# Altium PCB ESense.PcbDoc (part 3 of 3)
Units mil, origin at the board's own origin, x right, y up, seen from the top; angles counter-clockwise.
Board outline 9200 x 6300 mil, 4 copper layers (Top Layer, GND, POWER, Bottom Layer); 365 components, 215 nets, 1056 pads, 220 vias.
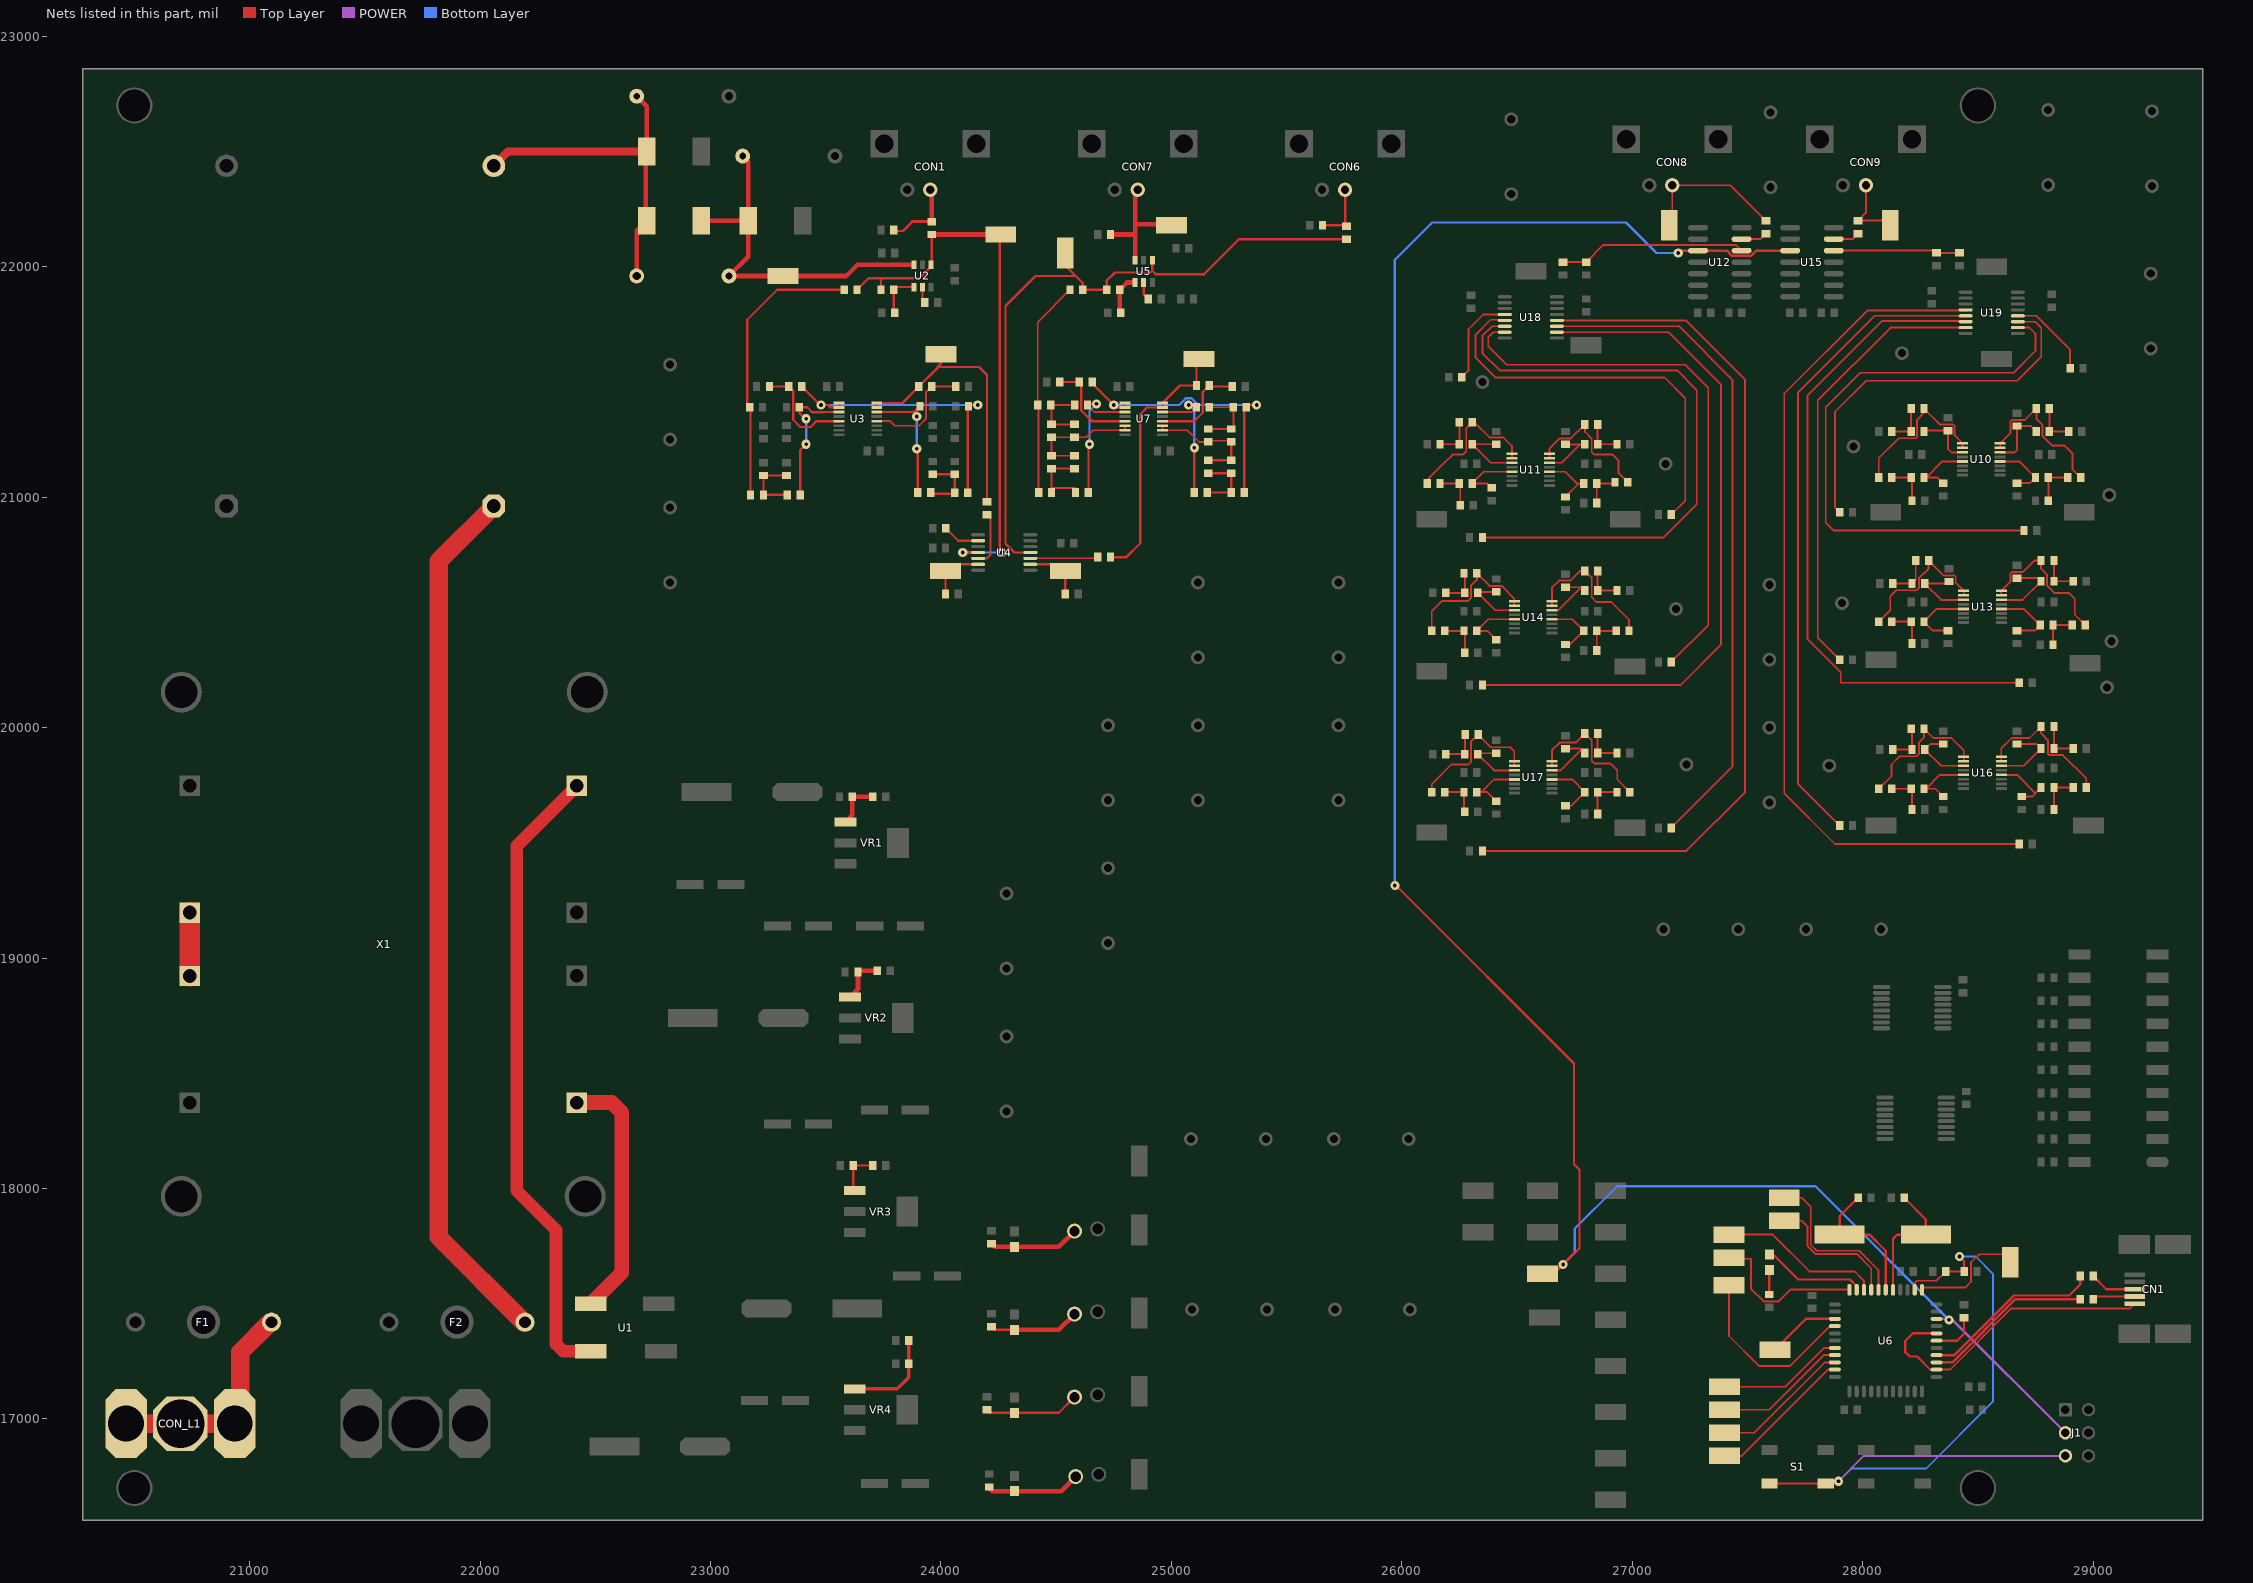
[diagram p5: the nets of this part, all layers, seen from the top]

## Via types
v1: diameter 40/36/36 (per signal layer), hole 16, Top Layer to Bottom Layer, tented both sides, 213 vias
v2: diameter 36, hole 16, Top Layer to Bottom Layer, 2 vias
v3: diameter 40/36/36 (per signal layer), hole 16, Top Layer to Bottom Layer, 1 vias
v4: diameter 35/36/36 (per signal layer), hole 16, Top Layer to Bottom Layer, tented both sides, 1 vias
v5: diameter 40/46/46 (per signal layer), hole 16, Top Layer to Bottom Layer, tented both sides, 1 vias
v6: diameter 60, hole 35, Top Layer to Bottom Layer, tented both sides, 1 vias
v7: diameter 65, hole 35, Top Layer to Bottom Layer, tented both sides, 1 vias

## Nets (pads, with @x,y where several pads share a name; then routed paths per layer and width w, separated by ;. In a path a pad name is that pad's centre, name@x,y a point inside that pad or via, vN(x,y) a via of type N, cw(c..) or ccw(c..) an arc to the next point about the centre after c; other vN are vias at no path point) (continued)
NetC14_1: C14.1 C15.2 R22.2 R23.2 | length 288
  Top Layer w10: R22.2@23330,21094 R23.2@23230,21094 C14.1@23230,21010 C15.2@23334,21010
NetC14_2: C14.2 R16.1 R120.1 | length 1234
  Top Layer w10: R16.1@23170,21390 23160,21400 23160,21770 23290,21900 R120.1@23580,21900 ; C14.2@23174,21010 R16.1@23174,21386
NetC15_1: C15.1 R17.2 U3.3 | length 598.1
  Top Layer w10: C15.1@23390,21010 23390,21205 v1(23415,21230) ; v1@23415,21345 23410,21340 23386,21364 R17.2@23386,21390 23420,21390 23441,21369 23492.84,21369 23493.84,21370 23557.83,21370 U3.3@23558.31,21369.53
  Bottom Layer w10: v1(23415,21230) 23415,21335 23410,21340 v1@23415,21345
  other v1: 23415,21340
NetC20_1: C20.1 R19.2 U3.14 | length 560.9
  Top Layer w10: U3.14@23721.69,21369.53 23883.53,21369.53 R19.2@23895,21381 ; v1(23895,21210) 23900,21205 C20.1@23900,21020 ; v1(23895,21350) R19.2@23895,21381 ; R19.2@23909,21395 R19.2@23895,21381
  Bottom Layer w10: v1(23895,21210) v1(23895,21350)
NetC20_2: C20.2 C21.1 R25.2 R26.2 | length 274
  Top Layer w10: C20.2@23961,21015 C21.1@24060,21015 ; R25.2@23965,21099 R26.2@24060,21099 C21.1@24060,21019
NetC21_2: C21.2 R14.2 R20.1 U3.1 U3.2 | length 1314.3
  Top Layer w10: R14.2@23396,21480 23476,21400 v1(23480,21400) 23510,21400 23520.79,21389.21 U3.2@23558.31,21389.21 U3.1@23558.31,21408.9 ; C21.2@24116,21019 24116,21391 R20.1@24120,21395 24125,21400 v1(24160,21400)
  Bottom Layer w10: v1@23485,21400 v1(24160,21400)
NetC22_1: C22.1 F2.2 | length 3799.8
  Top Layer w80: C22.1@22060,20961.81 21820,20721.81 21820,17790 22190,17420 F2.2@22195.28,17420
NetC22_2: C22.2 R27.1 R29.2 R30.2 R33.2 | length 1537.7
  Top Layer w20: R27.1@22680,21960 22680,22156 R29.2@22724,22200 22720,22204 22720,22476 22744,22500 R30.2@22724,22500 22724,22696 R33.2@22680,22740
  Top Layer w35: C22.2@22060,22438.19 22121.81,22500 R30.2@22724,22500
NetC31_1: C31.1 C32.1 R49.1 R50.1 U7.6 U7.7 | length 530.7
  Top Layer w8: R49.1@24580,21180 R50.1@24480,21180 C31.1@24480,21260 C32.1@24580,21260 24630,21260 24660.79,21290.79 U7.7@24798.31,21290.79 U7.6@24798.31,21310.47
NetC31_2: C31.2 C32.2 R41.2 R42.1 | length 284
  Top Layer w8: R41.2@24476,21400 R42.1@24580,21400 ; R41.2@24480,21396 C31.2@24480,21316 C32.2@24580,21316
NetC37_1: C37.1 C38.2 R49.2 R50.2 | length 288
  Top Layer w8: R49.2@24580,21124 R50.2@24480,21124 24480,21040 24584,21040
NetC37_2: C37.2 R41.1 R124.1 | length 919.6
  Top Layer w8: 24424,21040 24424,21396 R41.1@24420,21400 24420,21760 R124.1@24560,21900
NetC38_1: C38.1 R42.2 U7.3 | length 605.5
  Top Layer w8: 24640,21040 24640,21235 v1(24645,21230) ; v1(24675,21405) 24641,21405 R42.2@24636,21400 24666.47,21369.53 U7.3@24798.31,21369.53
  Bottom Layer w8: v1(24645,21230) 24645,21375 v1(24675,21405)
NetC39_1: C39.1 U6.16 Y1.2 | length 570.2
  Top Layer w10: U6.16@28131.5,17560.47 28131.5,17781.5 28150,17800 Y1.2@28274.02,17800 28274.02,17865.98 C39.1@28180,17960
NetC41_1: C41.1 U6.17 Y1.1 | length 591.7
  Top Layer w10: C41.1@27980,17960 27900,17880 Y1.1@27900,17800 28030,17800 28100,17730 U6.17@28100,17560.47
NetC42_1: C42.1 C43.1 R58.1 R59.1 U7.10 U7.11 | length 539
  Top Layer w8: U7.11@24961.69,21310.47 U7.10@24961.69,21290.79 25069.21,21290.79 25120,21240 C42.1@25160,21240 ; C42.1@25145,21245 C43.1@25265,21245
  Top Layer w10: R58.1@25160,21160 R59.1@25260,21160 C43.1@25260,21240
NetC42_2: C42.2 C43.2 R54.1 R55.2 | length 289
  Top Layer w8: C42.2@25160,21296 C43.2@25260,21296 ; R54.1@25165,21390 R55.2@25269,21390 C43.2@25269,21305
NetC46_1: C46.1 R54.2 U7.14 | length 584.3
  Top Layer w8: U7.14@24961.69,21369.53 25088.53,21369.53 R54.2@25109,21390
  Top Layer w10: v1(25075,21400) 25085,21390 R54.2@25109,21390 ; C46.1@25100,21020 v1(25100,21215)
  Bottom Layer w10: v1(25075,21400) 25100,21375 v1(25100,21215)
NetC46_2: C46.2 C47.1 R58.2 R59.2 | length 288
  Top Layer w10: C46.2@25156,21020 C47.1@25260,21020 R59.2@25260,21104 R58.2@25160,21104
NetC47_2: C47.2 R48.2 R55.1 U7.1 U7.2 | length 1278.3
  Top Layer w10: R48.2@24656,21500 24656,21494 v1(24750,21400) 24760.79,21389.21 U7.2@24798.31,21389.21 U7.1@24798.31,21408.9 ; C47.2@25316,21020 25316,21381 R55.1@25325,21390 25335,21400 v1(25370,21400)
  Bottom Layer w10: v1(24750,21400) 25033.99,21400 25062.99,21429 25087.01,21429 25116.01,21400 v1(25370,21400)
NetC48_1: C48.1 U6.6 | length 202
  Top Layer w10: U6.6@28320.47,17340 28410,17340 28440,17370 C48.1@28440,17440
NetC52_1: C52.1 R72.2 R73.1 | length 184
  Top Layer w8: R72.2@28126,21285 R73.1@28210,21285 C52.1@28210,21385
NetC52_2: C52.2 R78.1 U10.1 U10.2 | length 679.2
  Top Layer w8: R78.1@28070,21085 28070,21170 28156,21256 28230.14,21256 28236,21261.86 28236,21336 C52.2@28266,21366 ; C52.2@28266,21385 28336,21315 28393.14,21315 28399,21309.14 28399,21268.2 U10.1@28433.31,21233.9 U10.2@28433.31,21214.21
NetC53_1: C53.1 R74.2 R75.1 | length 179
  Top Layer w8: R74.2@26166,21230 R75.1@26250,21230 C53.1@26250,21325
NetC53_2: C53.2 R81.1 U11.1 U11.2 | length 640
  Top Layer w8: R81.1@26110,21060 26110,21075 26180.1,21145.1 ; 26180.3,21144.9 26220.4,21185 26265,21185 26280,21200 26280,21299 C53.2@26306,21325 26315,21325 26381,21259 26441,21259 26478.31,21221.69 U11.1@26478.31,21188.9 U11.2@26478.31,21169.21
NetC54_1: C54.1 C55.2 R70.1 | length 184
  Top Layer w8: R70.1@28810,21385 C54.1@28810,21285 C55.2@28894,21285
NetC54_2: C54.2 R76.2 U10.14 | length 275.6
  Top Layer w8: U10.14@28596.69,21194.53 28659.53,21194.53 28670,21205 R76.2@28670,21309 28730,21309 C54.2@28754,21285
NetC56_1: C56.1 C57.2 R71.1 | length 169
  Top Layer w8: R71.1@26850,21315 C56.1@26850,21230 C57.2@26934,21230
NetC56_2: C56.2 R77.2 U11.14 | length 268.6
  Top Layer w8: U11.14@26641.69,21149.53 26694.53,21149.53 26774,21229 C56.2@26793,21229 ; R77.2@26710,21229 C56.2@26793,21229 ; C56.2@26794,21230 C56.2@26793,21229
NetC58_2: C58.2 R73.2 U10.3 | length 248.7
  Top Layer w8: R73.2@28270,21289 C58.2@28370,21289 28370,21210 28385.47,21194.53 U10.3@28433.31,21194.53
NetC61_2: C61.2 R75.2 U11.3 | length 310.1
  Top Layer w8: C61.2@26410,21229 26409,21230 R75.2@26306,21230 26386.47,21149.53 U11.3@26478.31,21149.53
NetC64_2: C64.2 R78.2 R79.1 | length 185.7
  Top Layer w8: R78.2@28126,21085 R79.1@28210,21085 28214,21081 C64.2@28214,20985
NetC65_2: C65.2 R83.2 R84.1 | length 184
  Top Layer w8: C65.2@28806,20985 R83.2@28806,21085 R84.1@28890,21085
NetC66_2: C66.2 R81.2 R82.1 | length 175
  Top Layer w8: R81.2@26166,21060 R82.1@26250,21060 ; C66.2@26254,20965 R82.1@26254,21056
NetC67_2: C67.2 R85.2 R86.1 | length 159
  Top Layer w8: C67.2@26846,20975 R85.2@26846,21060 R86.1@26920,21060
NetC68_2: C68.2 R79.2 U10.5 | length 290.3
  Top Layer w8: C68.2@28350,21061 28326,21085 R79.2@28266,21085 28275,21085 28345.16,21155.16 U10.5@28433.31,21155.16
NetC69_2: C69.2 R83.1 U10.12 | length 272.3
  Top Layer w8: U10.12@28596.69,21155.16 28679.84,21155.16 R83.1@28750,21085 28726,21061 C69.2@28670,21061
NetC70_2: C70.2 R82.2 U11.5 | length 285
  Top Layer w8: C70.2@26390,21041 26371,21060 R82.2@26306,21060 26356.16,21110.16 U11.5@26478.31,21110.16
NetC71_2: C71.2 R85.1 U11.12 | length 252.5
  Top Layer w8: U11.12@26641.69,21110.16 26709.84,21110.16 26760,21060 26769,21060 ; C71.2@26710,21001 26769,21060 ; R85.1@26790,21060 26769,21060
NetC73_1: C73.1 C74.2 R89.1 | length 190.6
  Top Layer w8: C73.1@28130,20625 C74.2@28214,20625 28230,20641 R89.1@28230,20725
NetC74_1: C74.1 R91.2 U13.3 | length 306.2
  Top Layer w8: R91.2@28375,20634 28366,20625 C74.1@28270,20625 28340.47,20554.53 U13.3@28438.31,20554.53
NetC75_1: C75.1 C76.2 R87.1 | length 174
  Top Layer w8: R87.1@28830,20725 C75.1@28830,20635 C76.2@28914,20635
NetC75_2: C75.2 R92.2 U13.14 | length 315.4
  Top Layer w8: U13.14@28601.69,20554.53 28693.53,20554.53 C75.2@28774,20635 28760,20649 R92.2@28670,20649
NetC77_1: C77.1 C78.2 R90.1 | length 170.7
  Top Layer w8: C77.1@26190,20585 C78.2@26274,20585 26274,20666 R90.1@26270,20670
NetC78_1: C78.1 R93.2 U14.3 | length 271.2
  Top Layer w8: R93.2@26410,20589 26334,20589 C78.1@26330,20585 26405.47,20509.53 U14.3@26488.31,20509.53
NetC79_1: C79.1 C80.2 R88.1 | length 169
  Top Layer w8: R88.1@26850,20680 C79.1@26850,20595 C80.2@26934,20595
NetC79_2: C79.2 R94.2 U14.14 | length 239.9
  Top Layer w8: U14.14@26651.69,20509.53 26679.53,20509.53 26779.5,20609.5 26780,20609 R94.2@26710,20609
NetC85_2: C85.2 R96.2 U13.5 | length 315.3
  Top Layer w8: C85.2@28370,20421 28305,20421 R96.2@28266,20460 28321.16,20515.16 U13.5@28438.31,20515.16
NetC86_2: C86.2 R97.2 R98.1 | length 169
  Top Layer w8: C86.2@28826,20360 R97.2@28826,20445 R98.1@28910,20445
NetC87_2: C87.2 R101.2 R102.1 | length 169
  Top Layer w8: C87.2@26846,20335 R101.2@26846,20420 R102.1@26930,20420
NetC89_2: C89.2 R95.2 R96.1 | length 180.7
  Top Layer w8: R95.2@28126,20460 R96.1@28210,20460 28214,20456 C89.2@28214,20365
NetC90_2: C90.2 R99.2 R100.1 | length 180.7
  Top Layer w8: R99.2@26186,20420 R100.1@26270,20420 26274,20416 C90.2@26274,20325
NetC91_2: C91.2 R97.1 U13.12 | length 307.3
  Top Layer w8: U13.12@28601.69,20515.16 28699.84,20515.16 R97.1@28770,20445 28746,20421 C91.2@28670,20421
NetC92_2: C92.2 R100.2 U14.5 | length 283.2
  Top Layer w8: C92.2@26410,20381 26371,20420 R100.2@26326,20420 26376.16,20470.16 U14.5@26488.31,20470.16
NetC93_2: C93.2 R101.1 U14.12 | length 263.5
  Top Layer w8: U14.12@26651.69,20470.16 26739.84,20470.16 R101.1@26790,20420 26731,20361 C93.2@26710,20361
NetC94_1: C94.1 C95.2 R105.1 | length 175.7
  Top Layer w8: C94.1@28130,19905 C95.2@28214,19905 28214,19991 R105.1@28210,19995
NetC95_1: C95.1 R108.2 U16.3 | length 287.4
  Top Layer w8: R108.2@28350,19929 28294,19929 C95.1@28270,19905 28340.47,19834.53 U16.3@28438.31,19834.53
NetC96_1: C96.1 C97.2 R104.1 | length 179
  Top Layer w8: R104.1@28830,20005 C96.1@28830,19910 C97.2@28914,19910
NetC96_2: C96.2 R109.2 U16.14 | length 315.4
  Top Layer w8: U16.14@28601.69,19834.53 28698.53,19834.53 C96.2@28774,19910 28755,19929 R109.2@28670,19929
NetC98_1: C98.1 C99.2 R107.1 | length 168
  Top Layer w8: C98.1@26190,19885 C99.2@26274,19885 R107.1@26274,19969
NetC99_1: C99.1 R110.2 U17.3 | length 269.2
  Top Layer w8: R110.2@26410,19889 26334,19889 C99.1@26330,19885 26400.47,19814.53 U17.3@26488.31,19814.53
NetC100_1: C100.1 C101.2 R106.1 | length 169
  Top Layer w8: R106.1@26850,19975 C100.1@26850,19890 C101.2@26934,19890
NetC100_2: C100.2 R111.2 U17.14 | length 236.4
  Top Layer w8: U17.14@26651.69,19814.53 26689.53,19814.53 26779.5,19904.5 26775,19909 R111.2@26710,19909
NetC107_1: C107.1 C108.2 R116.1 | length 179
  Top Layer w8: R116.1@28830,19645 C107.1@28830,19740 C108.2@28914,19740
NetC107_2: C107.2 R118.2 U16.12 | length 281
  Top Layer w8: U16.12@28601.69,19795.16 28669.84,19795.16 28749.5,19715.5 ; R118.2@28690,19701 28735,19701 28749.5,19715.5 ; C107.2@28774,19740 28749.5,19715.5
NetC108_1: C108.1 R104.2 U16.15 U16.16 | length 648.2
  Top Layer w8: U16.15@28601.69,19854.21 U16.16@28601.69,19873.9 28601.69,19909.83 28646.86,19955 28724,19955 R104.2@28774,20005 28774,19976 28804,19946 28804,19886.86 28809.86,19881 28869,19881 28970,19780 C108.1@28970,19740
NetC109_1: C109.1 C110.2 R117.1 | length 179
  Top Layer w8: R117.1@26850,19625 C109.1@26850,19720 C110.2@26934,19720
NetC109_2: C109.2 R119.2 U17.12 | length 273.6
  Top Layer w8: U17.12@26651.69,19775.16 26738.84,19775.16 C109.2@26794,19720 26735,19661 R119.2@26710,19661
NetC110_1: C110.1 R106.2 U17.15 U17.16 | length 617.3
  Top Layer w8: U17.15@26651.69,19834.21 U17.16@26651.69,19853.9 26651.69,19901.69 26685,19935 26754,19935 R106.2@26794,19975 26824,19945 26824,19856 26835,19845 26905,19845 26935,19815 26935,19775 C110.1@26990,19720
NetC111_2: C111.2 R112.2 R113.1 | length 175.7
  Top Layer w8: R112.2@28126,19735 R113.1@28210,19735 28214,19731 C111.2@28214,19645
NetC112_2: C112.2 R114.2 R115.1 | length 165
  Top Layer w8: R114.2@26186,19720 R115.1@26270,19720 C112.2@26270,19639
NetC113_2: C113.2 R113.2 U16.5 | length 295.3
  Top Layer w8: C113.2@28350,19701 28316,19735 R113.2@28266,19735 28275,19735 28335.16,19795.16 U16.5@28438.31,19795.16
NetC114_2: C114.2 R115.2 U17.5 | length 266.3
  Top Layer w8: R115.2@26326,19720 26345,19720 ; C114.2@26410,19681 26371,19720 26345,19720 ; U17.5@26488.31,19775.16 26400.16,19775.16 26345,19720
NetCN1_2: CN1.2 R43.1 | length 184.8
  Top Layer w10: R43.1@29000,17520 29011.5,17531.5 CN1.2@29180,17531.5
NetCN1_3: CN1.3 R47.1 | length 203.6
  Top Layer w10: R47.1@29000,17620 29057.01,17562.99 CN1.3@29180,17562.99
NetCON1_1: CON1.1 R1.2 R2.2 | length 323.5
  Top Layer w10: R2.2@23796,22160 23801,22155 23835,22155 23836,22156
  Top Layer w12: 23836,22156 23876,22196 R1.2@23960,22196
  Top Layer w20: CON1.1@23954,22334 23960,22328 R1.2@23960,22196
NetCON2_1: CON2.1 D1.1 R3.1 | length 393.9
  Top Layer w20: R3.1@24220,17760 24233.46,17746.54 D1.1@24320,17746.54 24511.54,17746.54 CON2.1@24580,17815
NetCON3_1: CON3.1 D2.1 R7.1 | length 393.9
  Top Layer w10: R7.1@24220,17400 24233.46,17386.54 D2.1@24320,17386.54
  Top Layer w20: D2.1@24320,17386.54 24511.54,17386.54 CON3.1@24580,17455
NetCON4_1: CON4.1 D3.1 R15.1 | length 413.9
  Top Layer w10: R15.1@24200,17040 24213.46,17026.54 D3.1@24320,17026.54 24511.54,17026.54 CON4.1@24580,17095
NetCON5_1: CON5.1 D4.1 R24.1 | length 411.9
  Top Layer w20: R24.1@24210,16705 24210,16700 24223.46,16686.54 D4.1@24320,16686.54 24521.54,16686.54 CON5.1@24585,16750
NetCON6_1: CON6.1 R37.2 R38.2 | length 254.8
  Top Layer w10: R38.2@25656,22180 25756,22180 25754,22182 CON6.1@25754,22334
NetCON7_1: CON7.1 R39.2 TP5.1 U5.3 | length 584.8
  Top Layer w20: R39.2@24736,22140 24842.6,22140 ; U5.3@24842.6,22028.23 24842.6,22140 ; CON7.1@24854,22334 24842.6,22322.6 24842.6,22185 ; TP5.1@25000,22160 24975,22185 24842.6,22185 ; 24842.6,22140 24842.6,22185
NetCON8_1: CON8.1 R80.1 TP26.1 | length 649.6
  Top Layer w8: TP26.1@27160,22180 27174,22194 CON8.1@27174,22354 27426,22354 R80.1@27580,22200
NetCON9_1: CON9.1 R103.1 TP27.1 | length 316.4
  Top Layer w8: CON9.1@28014,22354 28014,22234 R103.1@27980,22200 28100,22200 TP27.1@28120,22180
NetCON_L1_1: CON_L1.1 F1.1 | length 1002.8
  Top Layer w80: CON_L1.1@20463.78,16980 CON_L1.1@20700,16980 ; CON_L1.1@20683.78,16980 CON_L1.1@20700,16980 ; F1.1@21087.5,17417.5 20960,17290 20960,16980 CON_L1.1@20936.22,16980 20715,16980 CON_L1.1@20700,16980
NetD_STAT1_2: D_STAT1.2 R56.1 | length 106.5
  Top Layer w10: R56.1@27595,17540 D_STAT1.2@27595,17646.54
NetR4_2: R4.2 R6.2 VR1.2 | length 209.9
  Top Layer w20: VR1.2@23585.83,19590.55 23616,19620.72 R6.2@23616,19700 R4.2@23704,19700
NetR5_1: R5.1 U2.5 | length 70.9
  Top Layer w10: U2.5@23920,21911.77 23920,21855 R5.1@23930,21845
NetR8_2: R8.2 R12.1 U3.12 | length 488.4
  Top Layer w8: U3.12@23721.69,21330.16 23779.84,21330.16 23800,21310 23905,21310 23935,21340 23935,21455 R12.1@23960,21480
  Top Layer w10: R12.1@23960,21480 R8.2@24064,21480
NetR9_2: R9.2 R10.1 U2.4 | length 198.3
  Top Layer w10: R10.1@23800,21800 23796,21804 R9.2@23796,21900 23807.77,21911.77 U2.4@23882.6,21911.77 U2.4@23882.6,21906.6
NetR11_2: R11.2 R14.1 U3.5 | length 458.4
  Top Layer w10: R11.2@23256,21480 R14.1@23340,21480 23359,21461 23359,21336 23390,21305 23435,21305 23460.16,21330.16 U3.5@23558.31,21330.16
NetR13_2: R13.2 R18.1 VR2.2 | length 209.7
  Top Layer w20: VR2.2@23605.83,18830.55 23640,18864.72 R18.1@23640,18940 23645,18945 R13.2@23724,18945
NetR21_2: R21.2 R28.1 VR3.2 | length 195.9
  Top Layer w10: VR3.2@23625.83,17990.55 23620,17996.38 R28.1@23620,18100 R21.2@23704,18100
NetR34_2: R34.2 U4.2 | length 163.1
  Top Layer w10: R34.2@24021,20865 24074.82,20811.18 U4.2@24161.81,20811.18
NetR35_1: R35.1 R36.1 VR4.2 | length 422.9
  Top Layer w15: VR4.2@23620,17136.38 VR4.2@23625.83,17130.55 23810.55,17130.55 23860,17180 R35.1@23860,17240 R36.1@23860,17340
NetR40_2: R40.2 R46.1 U7.12 | length 413.9
  Top Layer w10: U7.12@24961.69,21330.16 25099.71,21330.16 25136,21366.44 25136,21456 R46.1@25165,21485 ; R46.1@25170,21480 R40.2@25264,21480
NetR43_2: R43.2 U6.3 | length 737.2
  Top Layer w10: U6.3@28320.47,17245.51 28389.3,17245.51 28663.79,17520 R43.2@28944,17520
NetR44_1: R44.1 U5.5 | length 80.1
  Top Layer w10: U5.5@24880,21931.77 24880,21880 R44.1@24900,21860
NetR45_2: R45.2 R48.1 U7.5 | length 419.8
  Top Layer w10: R45.2@24516,21500 R48.1@24600,21500 24609,21491 24609,21376.44 24655.29,21330.16 U7.5@24798.31,21330.16
NetR47_2: R47.2 U6.4 | length 786.7
  Top Layer w10: U6.4@28320.47,17277.01 28398.17,17277.01 28657.16,17536 28896,17536 28944,17584 R47.2@28944,17620
NetR51_2: R51.2 R52.1 U5.4 | length 181.4
  Top Layer w20: R52.1@24780,21800 24776,21804 R51.2@24776,21900 24807.77,21931.77 U5.4@24842.6,21931.77
NetR70_2: R70.2 R84.2 U10.15 U10.16 | length 680.7
  Top Layer w8: U10.15@28596.69,21214.21 U10.16@28596.69,21233.9 28641,21278.2 28641,21329.14 28646.86,21335 28704,21335 R70.2@28754,21385 28754,21340 28780,21314 28780,21265.86 28820.86,21225 28875,21225 28910,21190 28910,21121 R84.2@28946,21085
NetR71_2: R71.2 R86.2 U11.15 U11.16 | length 611.9
  Top Layer w8: U11.15@26641.69,21169.21 U11.16@26641.69,21188.9 26641.69,21211.69 26685,21255 26734,21255 R71.2@26794,21315 26795,21314 26795,21283.14 26824,21254.14 26824,21196 26835,21185 26915,21185 26940,21160 26940,21106 R86.2@26981,21065
NetR80_2: R80.2 U12.13 | length 115.5
  Top Layer w8: U12.13@27474.49,22120 27556,22120 R80.2@27580,22144
NetR87_2: R87.2 R98.2 U13.15 U13.16 | length 664.5
  Top Layer w8: U13.15@28601.69,20574.21 U13.16@28601.69,20593.9 28641,20633.2 28641,20669.14 28646.86,20675 28695,20675 28745,20725 R87.2@28774,20725 28774,20690 28800,20664 28800,20615.86 28830.86,20585 28895,20585 28920,20560 28920,20491 R98.2@28966,20445
NetR88_2: R88.2 R102.2 U14.15 U14.16 | length 628.9
  Top Layer w8: U14.15@26651.69,20529.21 U14.16@26651.69,20548.9 26651.69,20606.69 26685.43,20640.43 26686.86,20639 26733.14,20639 26774.14,20680 R88.2@26794,20680 26824,20650 26824,20566 26845,20545 26910,20545 26986,20469 R102.2@26986,20420
NetR89_2: R89.2 R95.1 U13.1 U13.2 | length 647.6
  Top Layer w8: R95.1@28070,20460 28120,20510 28120,20570 28146,20596 28234.14,20596 28244,20605.86 28244,20648.14 28286,20690.14 R89.2@28286,20725 28351,20660 28398.14,20660 28404,20654.14 28404,20628.2 U13.1@28438.31,20593.9 U13.2@28438.31,20574.21
NetR90_2: R90.2 R99.1 U14.1 U14.2 | length 636
  Top Layer w8: R99.1@26130,20420 26130,20505 26175,20550 26288.14,20550 26300,20561.86 26300,20615 26326,20641 R90.2@26326,20670 26381,20615 26433.14,20615 26488.31,20559.83 U14.1@26488.31,20548.9 U14.2@26488.31,20529.21
NetR103_2: R103.2 U15.13 | length 115.5
  Top Layer w8: U15.13@27874.49,22120 27956,22120 R103.2@27980,22144
NetR105_2: R105.2 R112.1 U16.1 U16.2 | length 642.5
  Top Layer w8: R112.1@28070,19735 28125,19790 28125,19840 28161,19876 28234.14,19876 28244,19885.86 28244,19934 28266,19956 R105.2@28266,19995 28306,19955 28385,19955 28438.31,19901.69 U16.1@28438.31,19873.9 U16.2@28438.31,19854.21
NetR107_2: R107.2 R114.1 U17.1 U17.2 | length 627.3
  Top Layer w8: R114.1@26130,19720 26130,19755 26215,19840 26290,19840 26300,19850 26300,19939 R107.2@26331,19970 26386,19915 26470,19915 26488.31,19896.69 U17.1@26488.31,19853.9 U17.2@26488.31,19834.21
NetR121_2: R121.2 U4.5 | length 239.9
  Top Layer w10: U4.5@24161.81,20734.41 24199.41,20734.41 24215,20750 24215,20909 R121.2@24200,20924
NetR122_1: R122.1 TP24.1 U4.6 | length 213
  Top Layer w10: R122.1@24020,20580 TP24.1@24020,20680 ; TP24.1@24048.82,20708.82 U4.6@24161.81,20708.82
NetR123_1: R123.1 TP25.1 U4.9 | length 223
  Top Layer w10: U4.9@24388.19,20708.82 TP25.1@24511.18,20708.82 ; R123.1@24540,20580 TP25.1@24540,20680
NetR125_1: R125.1 U4.10 | length 294.1
  Top Layer w8: U4.10@24388.19,20734.41 24388.78,20735 24675,20735 R125.1@24680,20740
NetR126_1: R126.1 R127.1 U12.12 | length 815.9
  Top Layer w8: R126.1@26700,22020 R127.1@26800,22020 26875,22095 27449.49,22095 U12.12@27474.49,22070
NetR128_1: R128.1 R129.1 U15.12 | length 549.7
  Top Layer w8: U15.12@27874.49,22070 28310,22070 R129.1@28320,22060 R128.1@28420,22060
NetR130_1: R130.1 U18.4 | length 405.2
  Top Layer w8: R130.1@26260,21520 26290,21550 26290,21730 26352.8,21792.8 U18.4@26446.81,21792.8
NetR131_1: R131.1 U19.12 | length 367.8
  Top Layer w8: U19.12@28673.19,21787.2 28752.8,21787.2 28900,21640 R131.1@28900,21560
NetR132_1: R132.1 U18.6 | length 2670.4
  Top Layer w8: R132.1@26350,20825 27135,20825 27280,20970 27280,21465 27195,21550 26425,21550 26350,21625 26350,21700 26391.61,21741.61 U18.6@26446.81,21741.61
NetR133_1: R133.1 U19.11 | length 1675.5
  Top Layer w8: R133.1@27900,20935 27880,20955 27880,21370 28015,21505 28670,21505 28775,21610 28775,21735 28748.39,21761.61 U19.11@28673.19,21761.61
NetR134_1: R134.1 U18.5 | length 1767.2
  Top Layer w8: U18.5@26446.81,21767.2 26444.02,21770 26385,21770 26320,21705 26320,21605 26405,21520 27140,21520 27230,21430 27230,20985 R134.1@27170,20925
NetR135_1: R135.1 U19.10 | length 2548.6
  Top Layer w8: U19.10@28673.19,21736.02 28723.98,21736.02 28750,21710 28750,21635 28655,21540 27990,21540 27840,21390 27840,20890 27875,20855 R135.1@28700,20855
NetR136_1: R136.1 U18.10 | length 3042.9
  Top Layer w8: R136.1@26350,20185 27210,20185 27385,20360 27385,21490 27158.98,21716.02 U18.10@26673.19,21716.02
NetR137_1: R137.1 U19.7 | length 1937.1
  Top Layer w8: R137.1@27900,20295 27805,20390 27805,21420 28121.02,21736.02 U19.7@28446.81,21736.02
NetR138_1: R138.1 U18.7 | length 2406.4
  Top Layer w8: U18.7@26446.81,21716.02 26396.02,21716.02 26375,21695 26375,21655 26455,21575 27230,21575 27330,21475 27330,20445 R138.1@27170,20285
NetR139_1: R139.1 U19.6 | length 2902.9
  Top Layer w8: U19.6@28446.81,21761.61 28443.43,21765 28085,21765 27760,21440 27760,20385.86 27905,20240.86 27905,20195 R139.1@28680,20195
NetR140_1: R140.1 U18.12 | length 3959
  Top Layer w8: R140.1@26350,19465 27235,19465 27490,19720 27490,21510 27232.8,21767.2 U18.12@26673.19,21767.2
NetR141_1: R141.1 U19.5 | length 2819
  Top Layer w8: R141.1@27900,19575 27720,19755 27720,21455 28052.2,21787.2 U19.5@28446.81,21787.2
NetR142_1: R142.1 U18.11 | length 2912.5
  Top Layer w8: U18.11@26673.19,21741.61 27203.39,21741.61 27435,21510 27435,19830 R142.1@27170,19565
NetR143_1: R143.1 U19.4 | length 3783.2
  Top Layer w8: U19.4@28446.81,21812.8 28444.02,21810 28020,21810 27660,21450 27660,19715 27880,19495 R143.1@28680,19495
NetTP7_1: TP7.1 U6.25 | length 315.2
  Top Layer w10: TP7.1@27620,17300 27754.49,17434.49 U6.25@27879.53,17434.49
NetU1_1: U1.1 X1.12 | length 1098.5
  Top Layer w65: X1.12@22419.96,18372.4 22572.6,18372.4 22615,18330 22615,17635 U1.1@22480,17500
NetU1_2: U1.2 X1.7 | length 2763.8
  Top Layer w55: X1.7@22419.96,19747.6 22160,19487.64 22160,17990 22330,17820 22330,17325 22361.69,17293.31 U1.2@22480,17293.31
NetX1_3: X1.3 X1.4 | length 275.2
  Top Layer w90: X1.4@20740.04,18922.4 X1.3@20740.04,19197.6
NOTCH_VOUT1: R12.2 R121.1 TP2.1 U3.15 U3.16 | length 1189.5
  Top Layer w10: U3.15@23721.69,21389.21 U3.16@23721.69,21408.9 23832.9,21408.9 R12.2@23904,21480 23987,21563 ; TP2.1@24000,21620 24000,21580 23985,21565 24165,21565 24200,21530 R121.1@24200,20980
NOTCH_VOUT2: R46.2 R125.2 TP6.1 U7.15 U7.16 | length 1156.3
  Top Layer w8: R46.2@25120,21496 R46.2@25109,21485 25109,21589 TP6.1@25120,21600
  Top Layer w10: R125.2@24736,20740 24805,20740 24865,20800 24865,21360 24894.21,21389.21 U7.15@24961.69,21389.21 U7.16@24961.69,21408.9 25037.8,21485 R46.2@25109,21485
PB5: TP28.1 U6.29 | length 549.3
  Top Layer w8: TP28.1@27400,17140 27665,17140 27833.5,17308.5 U6.29@27879.53,17308.5
PB6: TP29.1 U6.30 | length 577.7
  Top Layer w8: TP29.1@27400,17040 27595,17040 27832.01,17277.01 U6.30@27879.53,17277.01
PB7: TP30.1 U6.12 | length 510.8
  Top Layer w8: U6.12@28257.48,17560.47 28267.01,17570 28445,17570 28470,17595 28470,17680 28505,17715 28605,17715 TP30.1@28640,17680
PC6: TP31.1 U6.31 | length 606.1
  Top Layer w8: TP31.1@27400,16940 27530,16940 27835,17245 27879.02,17245 U6.31@27879.53,17245.51
PC7: TP32.1 U6.32 | length 634.4
  Top Layer w8: TP32.1@27400,16840 27475,16840 27849.02,17214.02 U6.32@27879.53,17214.02
PD2: TP33.1 U6.20 | length 707.6
  Top Layer w8: TP33.1@27420,17800 27610,17800 27770,17640 27965,17640 28005.51,17599.49 U6.20@28005.51,17560.47
PD5: TP34.1 U6.22 | length 699.5
  Top Layer w8: TP34.1@27420,17700 27425,17695 27515,17695 27515,17565 27570,17510 27635,17510 27687,17562 27940.99,17562 U6.22@27942.52,17560.47
PD6: TP35.1 U6.26 | length 805
  Top Layer w8: TP35.1@27420,17580 27420,17360 27550,17230 27685,17230 27857.99,17402.99 U6.26@27879.53,17402.99
PRE_AMP_OUT1: R1.1 R9.1 R120.2 TP1.1 U2.1 U4.4 | length 2500.7
  Top Layer w10: R120.2@23636,21900 23686,21950 23740,21950 ; R9.1@23740,21900 23740,21950 ; U2.1@23957.4,22008.23 23957.4,22000.55 23906.86,21950 23740,21950 ; v1(24095,20760) U4.4@24161.81,20760 ; v1@24255,20760 24255,22135 TP1.1@24260,22140
  Top Layer w12: U2.1@23957.4,22008.23 23960,22010.83 R1.1@23960,22140
  Top Layer w20: R1.1@23960,22140 TP1.1@24260,22140 TP1.1@24280,22160
  Bottom Layer w10: v1(24095,20760) v1(24265,20760)
PRE_AMP_OUT2: R37.1 R51.1 R124.2 TP4.1 U4.11 U5.1 | length 3024.5
  Top Layer w10: U4.11@24388.19,20760 24318.99,20760 24280,20798.99 24280,21830 24410,21960 24585,21960 ; TP4.1@24540,22060 24540,22005 24585,21960 ; U5.1@24917.4,22028.23 24917.4,21982.4 ; R37.1@25760,22120 25295,22120 25140,21965 25138,21967 24932.8,21967 24917.4,21982.4 ; 24585,21960 24616,21929 R124.2@24616,21900 R51.1@24720,21900 24720,21940 24755,21975 24910,21975 24917.4,21982.4
RESET: C40.1 J1.5 R53.1 S1.1 S1.2 U6.13 | length 3215.9
  Top Layer w8: S1.2@27595.91,16720 S1.1@27840,16720 27885,16720 v1(27895,16730) ; U6.13@28225.98,17560.47 28225.98,17590.98 28235,17600 28320,17600 R53.1@28360,17640 C40.1@28440,17640 28440,17685 v1(28420,17705)
  POWER w8: v1(27895,16730) 28005,16840 J1.5@28880,16840
  Bottom Layer w8: v1(27895,16730) 27950,16785 28275,16785 28565,17075 28565,17630 28490,17705 v1(28420,17705)
SCK: J1.3 TP_SCK.1 U6.9 U12.3 U15.3 | length 9559.5
  Top Layer w10: v1@25970,19303 25987,19303 26747,18543 26747,18105 26771,18081 26771,17741 v1(26700,17670) 26660,17630 TP_SCK.1@26610,17630 ; v1@27210,22070 U12.3@27285.51,22070 27410.73,22070 27433.54,22047.19 27515.43,22047.19 27538.24,22070 U15.3@27685.51,22070 ; U6.9@28320.47,17434.49 v1@28370.51,17434.49
  POWER w10: v1(28375,17430) 28390,17430 J1.3@28880,16940
  Bottom Layer w10: v1@25970,19303 25970,22030 26132,22192 26973.25,22192 27105.25,22060 v1(27200,22060) ; v1(26700,17670) 26750,17720 26750,17825 26935,18010 27795,18010 v1(28375,17430)
  other v1: 25970,19315
SCL: TPSCL.1 U6.18 | length 721
  Top Layer w8: TPSCL.1@27660,17960 27735,17960 27775,17920 27775,17755 27800,17730 27985,17730 28068.5,17646.5 U6.18@28068.5,17560.47
SDA: TPSDA.1 U6.19 | length 604.9
  Top Layer w8: TPSDA.1@27660,17860 27735,17860 27761,17834 27761,17749.2 27794.2,17716 27974,17716 28037.01,17652.99 U6.19@28037.01,17560.47
STAT_LED: D_STAT1.1 U6.21 | length 451.5
  Top Layer w10: D_STAT1.1@27595,17713.46 27611.54,17713.46 27720,17605 27945,17605 27974.02,17575.98 U6.21@27974.02,17560.47
VOLT_SIG: R27.2 R29.1 R31.2 R32.2 TP3.1 U2.3 | length 1591.3
  Top Layer w20: R29.1@22960,22200 R31.2@23164,22200 ; R32.2@23140,22480 23164,22456 R31.2@23164,22200 ; U2.3@23882.6,22008.23 23638.23,22008.23 23590,21960 R27.2@23080,21960 23164,22044 R31.2@23164,22200
VUSB: CN1.1 U6.2 U6.7 | length 1342.3
  Top Layer w8: U6.2@28320.47,17214.02 28379.02,17214.02 28645,17480 29160,17480 CN1.1@29180,17500
  Top Layer w10: U6.2@28320.47,17214.02 28293.61,17214.02 28236.63,17271 28204,17271 28185,17290 28185,17337.99 28218.5,17371.5 U6.7@28320.47,17371.5
pads on no net: CN1.4 CN1.A CN1.B CN1.C CN1.D CON1.A CON1.B CON6.A CON6.B CON7.A CON7.B CON8.A CON8.B CON9.A CON9.B F1.3 F2.3 SW1.10 SW1.11 U3.8 U3.9 U4.7 U4.8 U7.8 U7.9 U10.8 U10.9 U11.8 U11.9 U12.1 U12.6 U12.9 U12.14 U13.8 U13.9 U14.8 U14.9 U15.1 U15.6 U15.9 U15.14 U16.8 U16.9 U17.8 U17.9 X1.0

## Polygon pours and split planes (outlines as drawn)
GND on Top Layer "Bottom Layer-No Net" (hatched 45Degree grid 20 track 8, remove dead copper, pour order 1001): 29465,22870 29465,22375 29465,16565 28488.31,16565 24925.96,16565 24920.82,16560 24920.82,16740 24920.82,16575 24931.1,16565 22695,16565 22695,22860 22705.28,22870 29465,22870
GND on Bottom Layer "Bottom Layer-No Net" (hatched 45Degree grid 20 track 8, remove dead copper, pour order 1000): 22695,22870 29465,22870 29465,16565 28925.25,16565 22695,16565 22695,22870
+5V on POWER "Bottom Layer-No Net" (solid, remove dead copper, pour order 1002): 29455,19240 25145,19240 24445,19940 23575,19940 23575,19370 24550,18285 25935,18285 25940,16575 29460,16575 29465,16580 29455,16590
+5V on POWER "Bottom Layer-No Net" (solid, remove dead copper, pour order 1003): 23862.3,19462.7 23862.3,19547.7 23912.3,19597.7 23992.3,19597.7 24002.3,19597.7 24042.3,19557.7 24042.3,19437.7 24042.3,19427.7 23997.3,19382.7 23992.3,19387.7 23887.3,19387.7 23862.3,19412.7 23862.3,19437.7 23862.3,19462.7
+2.5V on POWER "Bottom Layer-No Net" (solid, remove dead copper, pour order 1002): 23815.3,18666.67 23815.3,18751.67 23865.3,18801.67 23945.3,18801.67 23955.3,18801.67 23995.3,18761.67 23995.3,18641.67 23995.3,18631.67 23950.3,18586.67 23945.3,18591.67 23840.3,18591.67 23815.3,18616.67 23815.3,18641.67 23815.3,18666.67
-2.5V on POWER "Bottom Layer-No Net" (solid, remove dead copper, pour order 1001): 23575,17850 23660,17850 23710,17800 23710,17720 23710,17710 23670,17670 23550,17670 23540,17670 23495,17715 23500,17720 23500,17825 23525,17850 23550,17850 23575,17850
-5V on POWER "Bottom Layer-No Net" (solid, remove dead copper, pour order 1000): 23660,17020 23660,16865 23690,16835 23695,16830 23885,16830 23915,16860 23915,17020 23660,17020
GND on GND (split plane): 29439.92,16595.08 20310.08,16595.08 20310.08,16800 22580,16800 22580,18265 22320,18265 22320,19930 22590,19930 22590,21150 21160,21150 21160,22125 20310.08,22125 20310.08,22824.92 22575,22824.92 22575,21800 22805,21800 22805,22824.92 29439.92,22824.92

## Other copper
Top Layer:
  pour cut-out: 22850,22895 22850,21803.49 22846.51,21800 22590,21800 22590,22895
  text "V3" at 25193.62,17585.15 h800
Bottom Layer:
  pour cut-out: 22855,22895 22855,21803.49 22851.51,21800 22595,21800 22595,22895
GND (plane layer: these items are gaps in the copper):
  pour cut-out: 21810,22632.5 22320,22632.5 22320,22227.5 21810,22227.5
  pour cut-out: 22575,22870 22805,22870 22805,21800 22575,21800
  pour cut-out: 20275,16800 22580,16800 22580,18265 22320,18265 22320,19930 22590,19930 22590,21150 21160,21150 21160,22125 20275,22125

## Silkscreen, mask and mechanical layers (free items; w line width, h text height)
Top Overlay:
  drawing of 1936 lines, arcs and shapes, not listed
  text "VOLTAGE SIGNAL OUT" at 28365,22315 h45 r90
  text "CURRENT SIGNAL OUT" at 27520,22300 h50 r90
  text "VOLT_BYPASS" at 24305,22255 h60 r90
  text "BUFFERED_CURRENT" at 25210,22250 h60 r90
  text "CURRENT_BYPASS" at 26120,22250 h60 r90
  text "AUX_IN1" at 26665,21530 h80
  text "AUX_IN2" at 28480,21505 h80
  text "FILTER1" at 27780,21420 h80
  text "FILTER2" at 29020,21415 h80
  text "FILTER1" at 25815,21380 h80
  text "FILTER2" at 27030,21380 h80
  text "FILTER4" at 29005,20765 h80
  text "FILTER3" at 27732.23,20747.02 h80
  text "FILTER3" at 25780,20695 h80
  text "FILTER4" at 27070,20680 h80
  text "FILTER6" at 28980,20070 h80
  text "FILTER5" at 27785,20050 h80
  text "FILTER5" at 25813.99,20006.53 h80
  text "FILTER6" at 27104.56,19988.76 h80
  text "5 VOLT" at 24075.68,19340.68 h60 r90
  text "CNTRL" at 29410,18880 h100 r90
  text "Wideband Power Monitor" at 24540,18790 h250
  text "F7" at 29410,18790 h100 r90
  text "F6" at 29405,18685 h100 r90
  text "SPRING 2011" at 26180,18680 h100
  text "2.5 VOLT" at 24055.19,18597.5 h60 r90
  text "F5" at 29405,18585 h100 r90
  text "Henry E Herman I I I" at 24565,18570 h150
  text "F4" at 29405,18480 h100 r90
  text "Vikram Balakrishnan" at 24565,18425 h150
  text "F3" at 29405,18385 h100 r90
  text "F2" at 29405,18280 h100 r90
  text "F1" at 29405,18185 h100 r90
  text "F0" at 29405,18075 h100 r90
  text "-2.5 VOLT" at 24095,17709.16 h60 r90
  text "-5 VOLT" at 24032.03,16725.61 h60 r90

## Text inside footprints (layer, text, board x,y; h text height)
C1: Top Overlay "-" at 22872.05,19398.74 h40 r180; Top Overlay "+" at 23127.95,19349.53 h40
C2: Top Overlay "-" at 22924.09,19828.27 h40 r180; Top Overlay "+" at 23435.91,19779.06 h40
C3: Top Overlay "-" at 23652.05,19218.74 h40 r180; Top Overlay "+" at 23907.95,19169.53 h40
C6: Top Overlay "-" at 23672.05,18418.74 h40 r180; Top Overlay "+" at 23927.95,18369.53 h40
C7: Top Overlay "-" at 23252.05,19218.74 h40 r180; Top Overlay "+" at 23507.95,19169.53 h40
C8: Top Overlay "-" at 22864.09,18848.27 h40 r180; Top Overlay "+" at 23375.91,18799.06 h40
C13: Top Overlay "-" at 24067.95,17541.26 h40; Top Overlay "+" at 23812.05,17590.47 h40 r180
C18: Top Overlay "-" at 23507.95,18201.26 h40; Top Overlay "+" at 23252.05,18250.47 h40 r180
C19: Top Overlay "-" at 23695.91,17371.73 h40; Top Overlay "+" at 23184.09,17420.94 h40 r180
C22: Top Overlay "Caution-AC-110V@60Hz" at 22591.5,20991.34 h40 r90; Top Overlay "Y2 ONLY" at 21617.09,21404.72 h40 r90
C23: Top Overlay "Caution-AC-110V@60Hz" at 21431.5,20991.34 h40 r90; Top Overlay "Y2 ONLY" at 20457.09,21404.72 h40 r90
C24: Top Overlay "-" at 23927.95,16641.26 h40; Top Overlay "+" at 23672.05,16690.47 h40 r180
C25: Top Overlay "-" at 23152.05,17158.74 h40 r180; Top Overlay "+" at 23407.95,17109.53 h40
C26: Top Overlay "-" at 22524.09,16988.27 h40 r180; Top Overlay "+" at 23035.91,16939.06 h40
CON1: Mechanical 1 "BNC" at 23854,22446.5 h40
CON6: Mechanical 1 "BNC" at 25654,22446.5 h40
CON7: Mechanical 1 "BNC" at 24754,22446.5 h40
CON8: Mechanical 1 "BNC" at 27074,22466.5 h40
CON9: Mechanical 1 "BNC" at 27914,22466.5 h40
J1: Top Overlay "1" at 28849.37,17128.88 h40 r270; Top Overlay "2" at 28949.37,17128.88 h40 r270; Top Overlay "5" at 28849.37,16778.88 h40 r270; Top Overlay "6" at 28949.37,16778.88 h40 r270; Mechanical 1 "1" at 28849.37,17128.88 h40 r270; Mechanical 1 "2" at 28949.37,17128.88 h40 r270; Mechanical 1 "5" at 28849.37,16778.88 h40 r270; Mechanical 1 "6" at 28949.37,16778.88 h40 r270
U1: Top Overlay "~" at 22391.42,17362.2 h40; Top Overlay "~" at 22391.42,17155.51 h40; Top Overlay "+" at 22814.65,17391.73 h40; Top Overlay "_" at 22804.8,17234.25 h40
X1: Top Overlay "12" at 22574.09,18331.65 h40 r90; Top Overlay "11" at 22583.94,18617.09 h40 r90; Top Overlay "10" at 22574.09,18882.83 h40 r90; Top Overlay "9" at 22574.09,19168.27 h40 r90; Top Overlay "7" at 22574.09,19739.13 h40 r90; Top Overlay "6" at 20644.96,18361.18 h40 r90; Top Overlay "4" at 20635.12,18902.52 h40 r90; Top Overlay "3" at 20625.28,19178.11 h40 r90; Top Overlay "1" at 20654.8,19748.98 h40 r90; Top Overlay "CAUTION!" at 20408.74,17780.47 h40 r90; Top Overlay "6.3@ 2.4A" at 22790.63,18311.97 h40 r90; Top Overlay "6.3V @ 2.4A" at 22790.63,19158.43 h40 r90; Top Overlay "CAUTION!" at 20418.58,19965.51 h40 r90; Top Overlay "115/230V 50/60Hz" at 20408.74,18685.98 h40 r90